# EAGLE board Sonar_Power_Schematic_LT1117 (EAGLE 8.4.0)
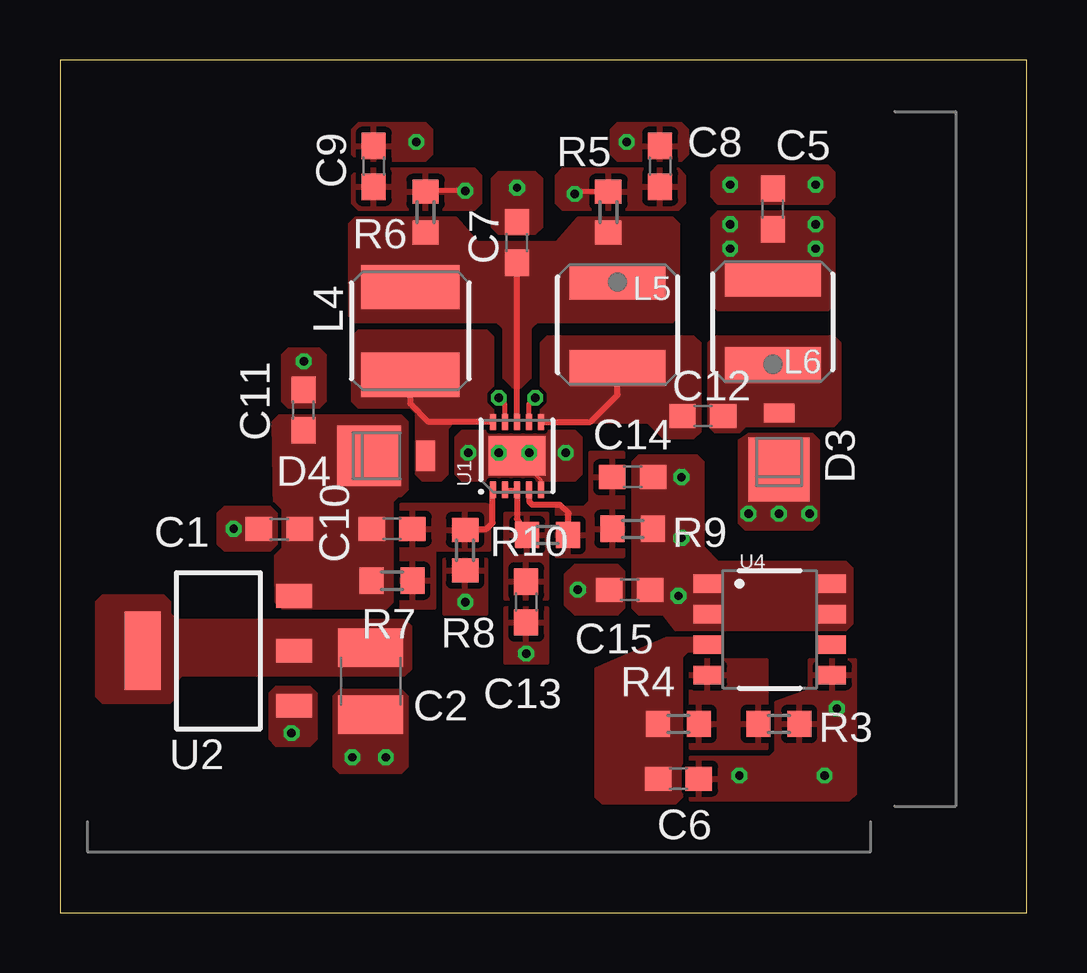
[diagram p0: board, top side]
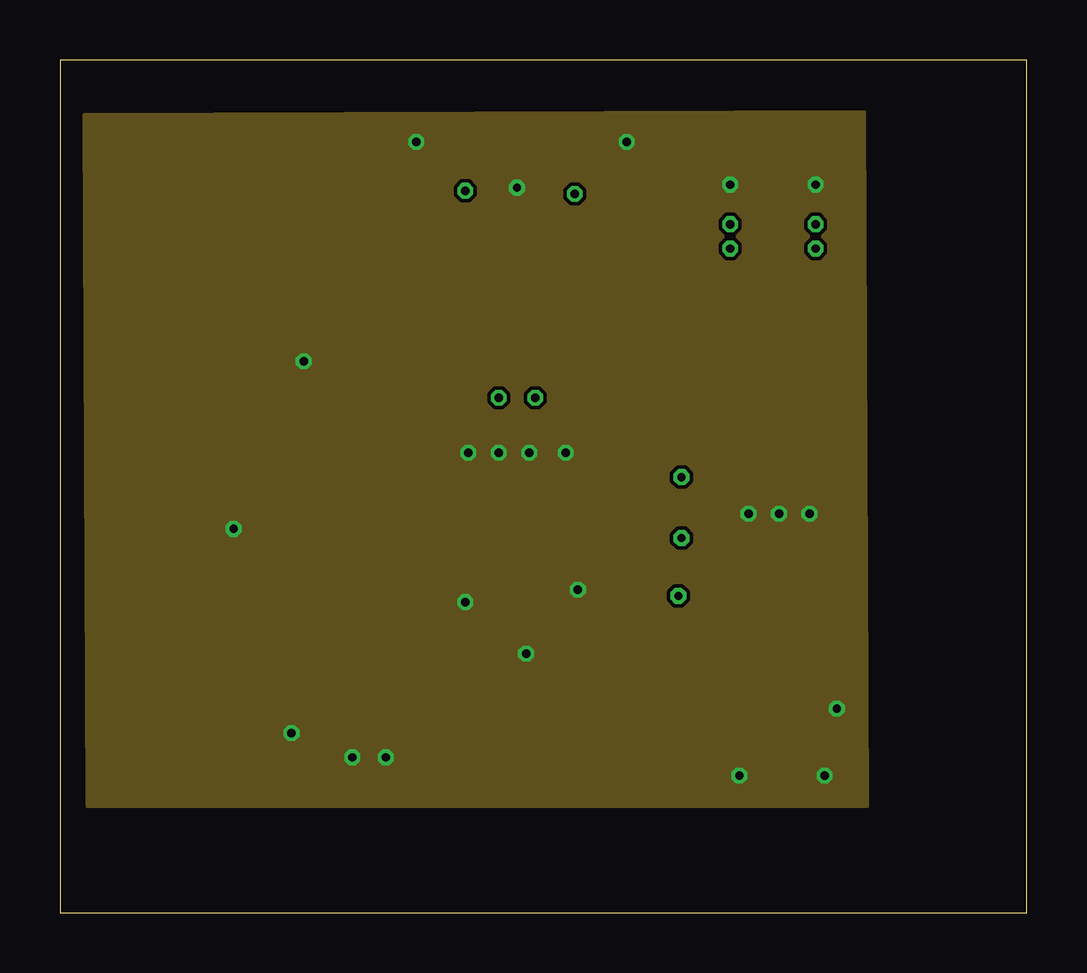
[diagram p1: board, inner layer Route2]
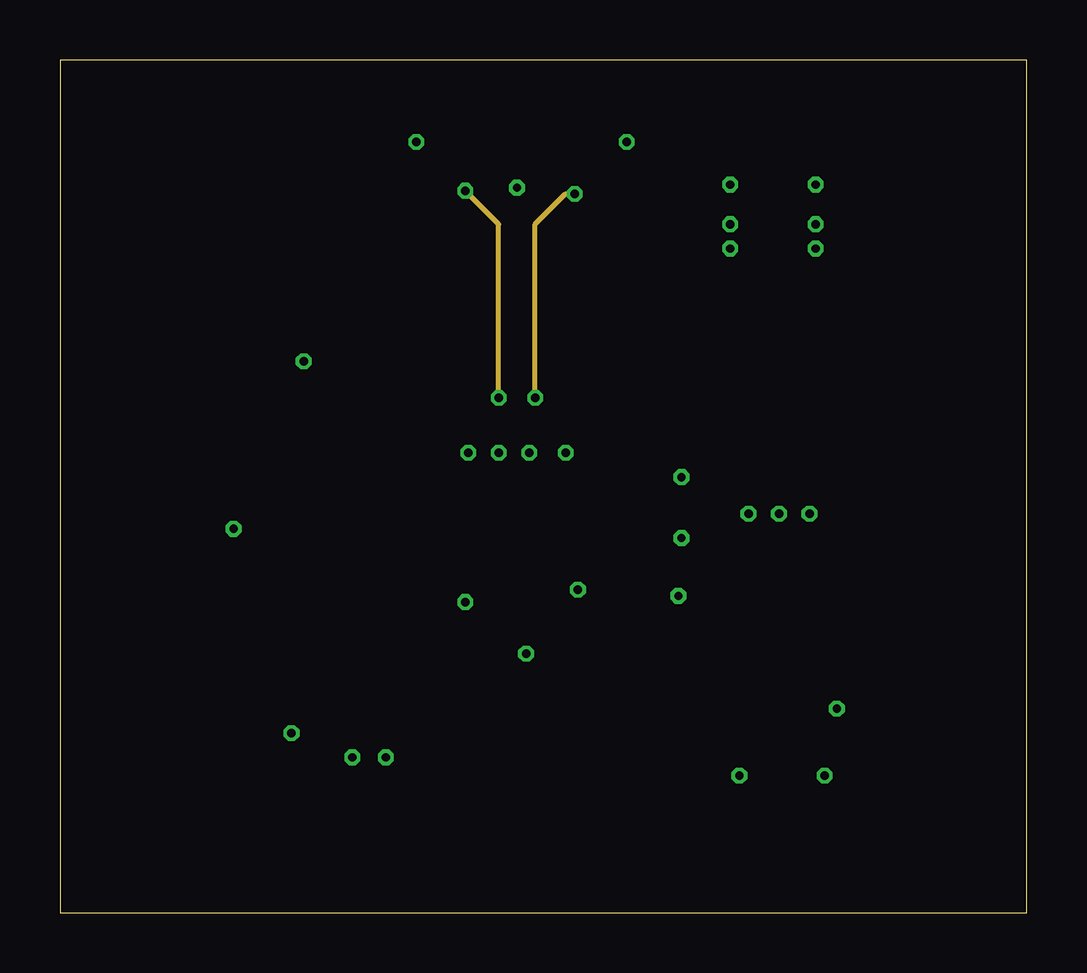
[diagram p2: board, inner layer Route15]
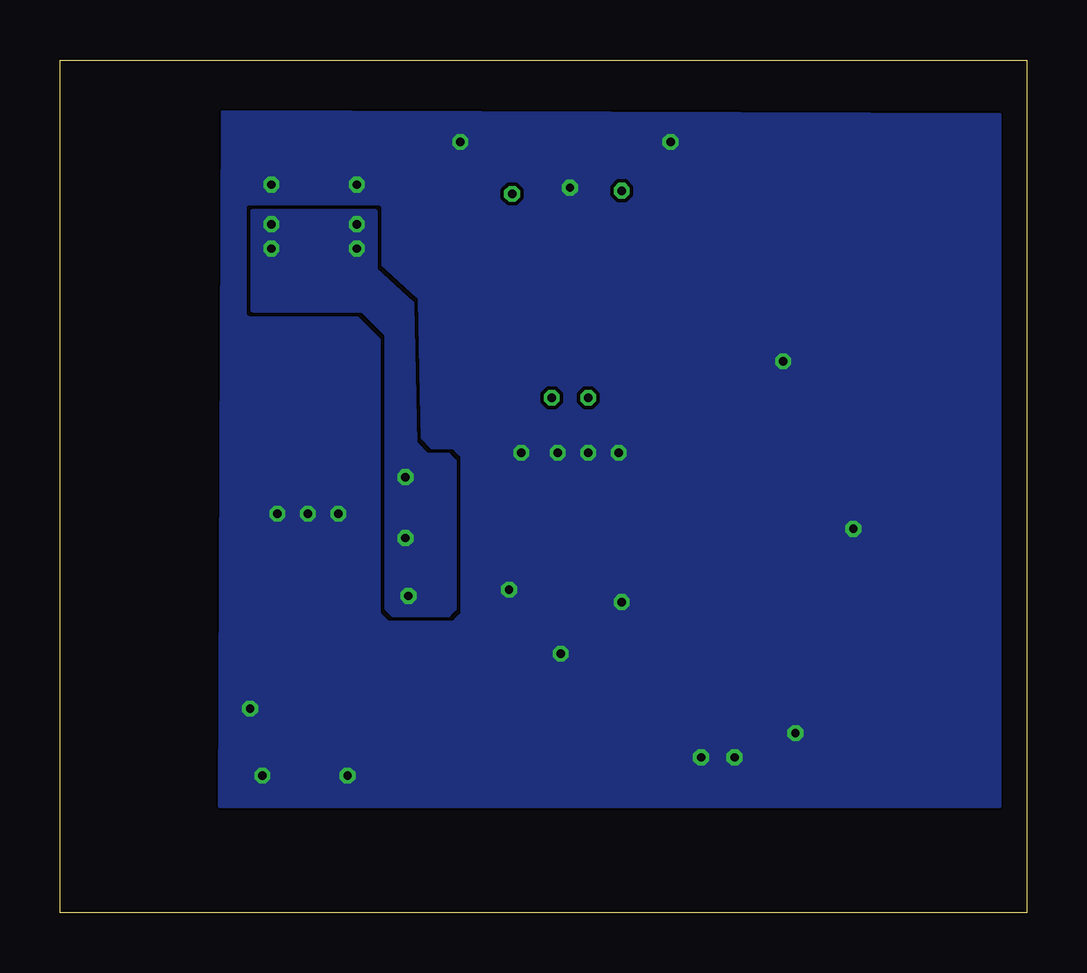
[diagram p3: board, bottom side, seen from below]

Size 40.31 x 35.55 mm. Coordinates in mm from the lower left corner, seen from the top.
Outline: 0,0 40.31,0 40.31,35.55 0,35.55 0,0
Copper layers (1*2*15*16): Top 0.035mm / dielectric 0.1702mm / Route2 0.0175mm / dielectric 47mil / Route15 0.0175mm / dielectric 0.1702mm / Bottom 0.035mm
Design rules "JLCPCB4Layer": minimum track width 6mil, minimum drill 10mil, track to track 6mil, track to pad 6mil, pad to pad 6mil, via to via 6mil, smd to smd 0mil, copper to edge 10mil, drill to drill 10mil, minimum pad ring 6mil, minimum via ring 6mil, stop-mask expansion 2mil, vias tented up to drill 100mil, thermal gap 10mil

## Footprints (pad centres in the part's own frame; a part is rotated, then mirrored left to right if it is on the bottom)
C0603 = smd 1.1 x 1: 1 -0.85,0; 2 0.85,0
C1210 = smd 1.6 x 2.7: 1 -1.4,0; 2 1.4,0
DO-216AA = smd 2.67 x 2.54: P$1 -0.699,0 | smd 0.8 x 1.27: P$2 1.653,0
NS4.9X4.9 = smd 1.85 x 4.1: P$1 -1.825,0; P$2 1.825,0
NS5X5 = smd 1.5 x 4: P$1 -1.8,0; P$2 1.8,0
R0603 = smd 1 x 1.1: 1 -0.85,0; 2 0.85,0
10-WFDFN = smd 0.675 x 0.25: P$1 -1.413,1; P$2 -1.413,0.5; P$3 -1.413,0; P$4 -1.413,-0.5; P$5 -1.413,-1; P$6 1.413,-1; P$7 1.413,-0.5; P$8 1.413,0; P$9 1.413,0.5; P$10 1.413,1 | smd 1.65 x 2.38: P$11 0,0
SOT233-3 = smd 0.991 x 1.499: P$1 -2.286,-3.15; P$2 0,-3.15; P$3 2.286,-3.15 | smd 3.277 x 1.499: P$4 0,3.15
8-SOIC = smd 1.143 x 0.762: P$1 -2.603,1.905; P$2 -2.603,0.635; P$3 -2.603,-0.635; P$4 -2.603,-1.905; P$5 2.603,-1.905; P$6 2.603,-0.635; P$7 2.603,0.635; P$8 2.603,1.905

## Placement (x,y rotation side)
C1  10uF  [C0603]  9.14,16 180 top
C2  100uF  [C1210]  12.95,9.65 270 top
C5  10uF  [C0603]  29.72,29.34 90 top
C6  1uF  [C0603]  25.78,5.59 0 top
C7  10uF  [C0603]  19.05,27.94 90 top
C8  0.33uF  [C0603]  25.02,31.12 90 top
C9  0.33uF  [C0603]  13.08,31.12 90 top
C10  0.33pF  [C0603]  13.84,16 0 top
C11  4.7uF  [C0603]  10.16,20.96 90 top
C12  1uF  [C0603]  26.8,20.7 0 top
C13  0.1uF  [C0603]  19.43,12.95 270 top
C14  68pF  [C0603]  23.88,18.16 0 top
C15  10uF  [C0603]  23.75,13.46 0 top
D3  MBRM120  [DO-216AA]  29.97,19.18 90 top
D4  MBRM120  [DO-216AA]  13.59,19.05 0 top
L4  2.2uH  [NS4.9X4.9]  14.61,24.26 270 top
L5  10uH  [NS5X5]  23.24,24.51 270 top
L6  15uH  [NS5X5]  29.72,24.64 90 top
R3  150kOhm  [R0603]  29.97,7.87 180 top
R4  47.5kOhm  [R0603]  25.78,7.87 180 top
R5  4.7kOhm  [R0603]  22.86,29.21 270 top
R6  4.7kOhm  [R0603]  15.24,29.21 270 top
R7  90.9kOhm  [R0603]  13.84,13.84 180 top
R8  15kOhm  [R0603]  16.89,15.11 90 top
R9  105kOhm  [R0603]  23.88,16 180 top
R10  15kOhm  [R0603]  20.32,15.75 180 top
U1  LT3471'  [10-WFDFN]  19.05,19.05 90 top
U2  LT1117-5  [SOT233-3]  6.6,10.92 90 top
U4  LT1175  [8-SOIC]  29.59,11.81 0 top

## Library data of the parts
C1 C2 C5-C15 R3-R10 = adafruit
D3 D4 L4-L6 U1 U2 U4 = Moira

## Nets
3.3V: C2.1 U2.P$2 U2.P$4
7.5V: C1.1 C10.1 C11.1 D4.P$1 R7.2 U2.P$3
-5V: C6.1 R4.2 U4.P$3
-7.5V: C5.1 C14.2 C15.2 L6.P$2 R9.1 U4.P$1 U4.P$2 U4.P$7 U4.P$8
GND: C1.2 C2.2 C5.2 C6.2 C7.2 C8.2 C9.2 C11.2 C13.2 C15.1 D3.P$1 R3.1 R8.1 U1.P$5 U1.P$11 U2.P$1 U4.P$5
N$9: R3.2 R4.1 U4.P$4
N$17: D4.P$2 L4.P$2 U1.P$10
N$18: C10.2 R7.1 R8.2 U1.P$1
N$20: C12.1 L5.P$2 U1.P$6
N$21: C12.2 D3.P$2 L6.P$1
N$26: C14.1 R9.2 R10.1 U1.P$4
SS1: C9.1 R6.1 U1.P$9
SS2: C8.1 R5.1 U1.P$7
VIN: C7.1 L4.P$1 L5.P$1 R5.2 R6.2 U1.P$8
VREF: C13.1 R10.2 U1.P$2 U1.P$3

## Tracks (layer width: path | path; a pad name or v marks a point on that pad's centre or on a via)
3.3V
  pour Top (no thermals): 14.61,11.94 14.61,10.16 14.35,9.91 5.08,9.91 4.83,9.65 4.83,9.02 4.57,8.76 1.78,8.76 1.52,9.02 1.52,12.95 1.78,13.21 4.32,13.21 4.57,12.95 4.57,12.45 4.83,12.19 14.35,12.19
7.5V
  pour Top (rank 2, no thermals): 14.22,20.7 9.14,20.7 8.89,20.45 9.02,12.95 9.27,12.7 13.59,12.7 13.84,12.95 13.84,17.14 14.1,17.4 14.22,17.4 14.48,17.65 14.48,20.45
-5V
  pour Top (no thermals): 27.56,11.43 25.27,11.43 22.35,10.16 22.35,4.83 22.61,4.57 25.65,4.57 25.91,4.83 25.91,10.67 26.16,10.92 27.56,10.92
-7.5V  (via drill 0.35)
  other vias: 25.91,18.16 27.94,28.7 31.5,28.7 25.78,13.21 25.91,15.62 27.94,27.69 31.5,27.69
  pour Top (no thermals): 25.78,14.61 25.78,11.81 32.77,11.81 33.02,12.07 33.02,14.35 32.77,14.61
  pour Top (no thermals): 27.18,28.96 27.18,25.4 27.43,25.15 32,25.15 32.26,25.4 32.26,28.96 32,29.21 27.43,29.21
  pour Top (no thermals): 23.88,18.8 23.88,12.7 24.13,12.45 25.15,12.45 25.65,11.81 27.43,11.81 27.43,14.61 26.8,15.24 26.8,18.8 26.54,19.05 24.13,19.05
  pour Bottom (no thermals): 27.18,26.8 27.18,29.21 32.26,29.21 32.26,25.15 27.69,25.15 26.67,24.13 26.67,12.7 26.42,12.45 24.13,12.45 23.88,12.7 23.88,18.8 24.13,19.05 25.02,19.05 25.53,19.56 25.65,25.4
GND  (via drill 0.35)
  Top 0.152: U1.P$5 20.05,18.05 U1.P$11
  other vias: 21.59,13.46 19.05,30.23 17.02,19.18 21.08,19.18 16.89,12.95 14.86,32.13 19.43,10.8 23.62,32.13 27.94,30.35 31.5,30.35 10.16,22.99 29.97,16.64 18.29,19.18 19.56,19.18 28.7,16.64 31.24,16.64 9.65,7.49 12.19,6.48 13.59,6.48 7.24,16 32.39,8.51 31.88,5.72 28.32,5.72
  pour Top (no thermals): 18.29,30.86 18.03,30.61 18.03,28.58 18.29,28.32 19.81,28.32 20.07,28.58 20.07,30.61 19.81,30.86
  pour Top (no thermals): 23.5,12.7 23.5,14.22 23.24,14.48 21.46,14.48 21.08,14.1 21.08,12.83 21.46,12.45 23.24,12.45
  pour Route2: 1.02,33.27 33.53,33.4 33.66,4.45 1.14,4.45
  pour Top (no thermals): 16.51,19.81 16.51,18.29 16.76,18.03 21.46,18.03 21.72,18.29 21.72,19.81 21.46,20.07 16.76,20.07
  pour Top: 16,14.73 17.78,14.73 17.78,12.45 16,12.45
  pour Top: 12.19,32.64 12.19,31.62 12.45,31.37 15.24,31.37 15.49,31.62 15.49,32.64 15.24,32.89 12.45,32.89
  pour Top: 18.54,12.7 18.54,10.41 20.32,10.41 20.32,12.7
  pour Bottom (rank 2): 1.14,33.27 1.14,4.45 33.66,4.45 33.53,33.4
  pour Top: 23.24,32.89 22.99,32.64 22.99,31.62 23.24,31.37 25.91,31.37 26.16,31.62 26.16,32.64 25.91,32.89
  pour Top (no thermals): 32.26,29.84 32.26,30.86 32,31.12 27.43,31.12 27.18,30.86 27.18,29.84 27.43,29.59 32,29.59
  pour Top (no thermals): 9.53,23.5 10.79,23.5 11.05,23.24 11.05,21.34 10.79,21.08 9.53,21.08 9.27,21.34 9.27,23.24
  pour Top (no thermals): 28.32,19.69 28.7,19.94 31.37,19.94 31.62,19.69 31.62,16.26 31.37,16 28.58,16 28.32,16.26
  pour Top (no thermals): 6.6,15.37 6.6,16.64 6.86,16.89 8.76,16.89 9.02,16.64 9.02,15.37 8.76,15.11 6.86,15.11
  pour Top (no thermals): 10.41,6.99 9.02,6.99 8.76,7.24 8.76,9.14 9.02,9.4 10.41,9.4 10.67,9.14 10.67,7.24
  pour Top (no thermals): 14.22,5.84 11.68,5.84 11.43,6.1 11.43,9.02 11.68,9.27 14.22,9.27 14.48,9.02 14.48,6.1
  pour Top: 29.59,6.48 29.84,6.73 29.84,8.76 31.24,9.27 31.24,10.54 33.15,10.54 33.15,4.95 32.89,4.7 26.29,4.7 26.29,6.48
N$9
  pour Top: 26.29,6.86 29.46,6.86 29.46,10.54 26.29,10.54
N$17
  Top 0.254: U1.P$10 15.35,20.46 14.61,21.21 L4.P$2
  pour Top (no thermals): 18.03,24 18.03,20.7 17.78,20.45 16.38,20.45 16.13,20.19 16.13,18.29 15.88,18.03 15.11,18.03 14.86,18.29 14.86,20.83 14.61,21.08 12.45,21.08 12.19,21.34 12.19,24 12.45,24.26 17.78,24.26
N$18
  Top 0.254: R8.2 16.93,16 17.78,16 18.03,16.26 18.03,17.62 U1.P$1
  pour Top: 14.22,17.02 14.22,12.7 15.62,12.7 15.62,15.11 17.91,15.11 17.91,17.02
N$20
  Top 0.254: U1.P$6 22.11,20.46 23.24,21.59 L5.P$2
  pour Top (no thermals): 26.67,23.75 26.67,20.07 26.42,19.81 25.15,19.81 24.51,20.45 20.32,20.45 20.07,20.7 20.07,23.75 20.32,24 26.42,24
N$21
  pour Top (no thermals): 27.05,23.75 27.05,20.32 27.3,20.07 28.32,20.07 28.58,20.32 32.26,20.32 32.51,20.57 32.51,23.75 32.26,24 27.3,24
N$26
  Top 0.254: U1.P$4 19.56,17.14 19.69,17.02 20.83,17.02 21.21,16.64 21.17,16.6 R10.1
  pour Top: 20.7,16.89 20.7,14.86 23.5,14.86 23.5,19.18 22.1,19.18 22.1,17.14 21.84,16.89
SS1  (via drill 0.35)
  Top 0.203: U1.P$9 18.55,21.2 v18.29,21.46 | v16.89,30.1 15.28,30.1 R6.1
  Route15 0.203: v18.29,21.46 18.29,28.7 v16.89,30.1
  pour Top: 12.45,30.99 12.19,30.73 12.19,29.59 12.45,29.34 17.27,29.34 17.53,29.59 17.53,30.73 17.27,30.99
SS2  (via drill 0.35)
  Top 0.203: U1.P$7 19.55,21.2 v19.81,21.46 | R5.1 21.55,30.06 v21.46,29.97
  Route15 0.203: v19.81,21.46 19.81,28.7 21.08,29.97 v21.46,29.97
  pour Top: 20.7,30.73 20.7,29.59 20.96,29.34 25.78,29.34 26.04,29.59 26.04,30.73 25.78,30.99 20.96,30.99
VIN
  Top 0.254: U1.P$8 C7.1
  pour Top (no thermals): 12.07,28.7 12.07,24.89 12.32,24.64 25.53,24.64 25.78,25.02 25.78,28.7 25.53,28.96 21.59,28.96 20.7,27.94 17.4,27.94 16.51,28.96 12.32,28.96
  pour Top: 18.54,24.38 18.54,22.35 18.92,21.97 19.18,21.97 19.56,22.35 19.56,24.38 19.94,24.77 19.94,27.69 18.29,27.69 18.16,27.56 18.16,24.77
VREF
  Top 0.152: U1.P$2 U1.P$3
  Top 0.254: U1.P$3 19.05,16.42 R10.2
  pour Top: 18.54,16.64 18.54,13.08 20.32,13.08 20.32,16.64